# Altium PCB Smart_home.PcbDoc
Units mm, origin at the board's own origin, x right, y up, seen from the top; angles counter-clockwise.
Board outline 86.39 x 76.44 mm, 2 copper layers (Top Layer, Bottom Layer); 15 components, 39 nets, 127 pads, 6 vias.
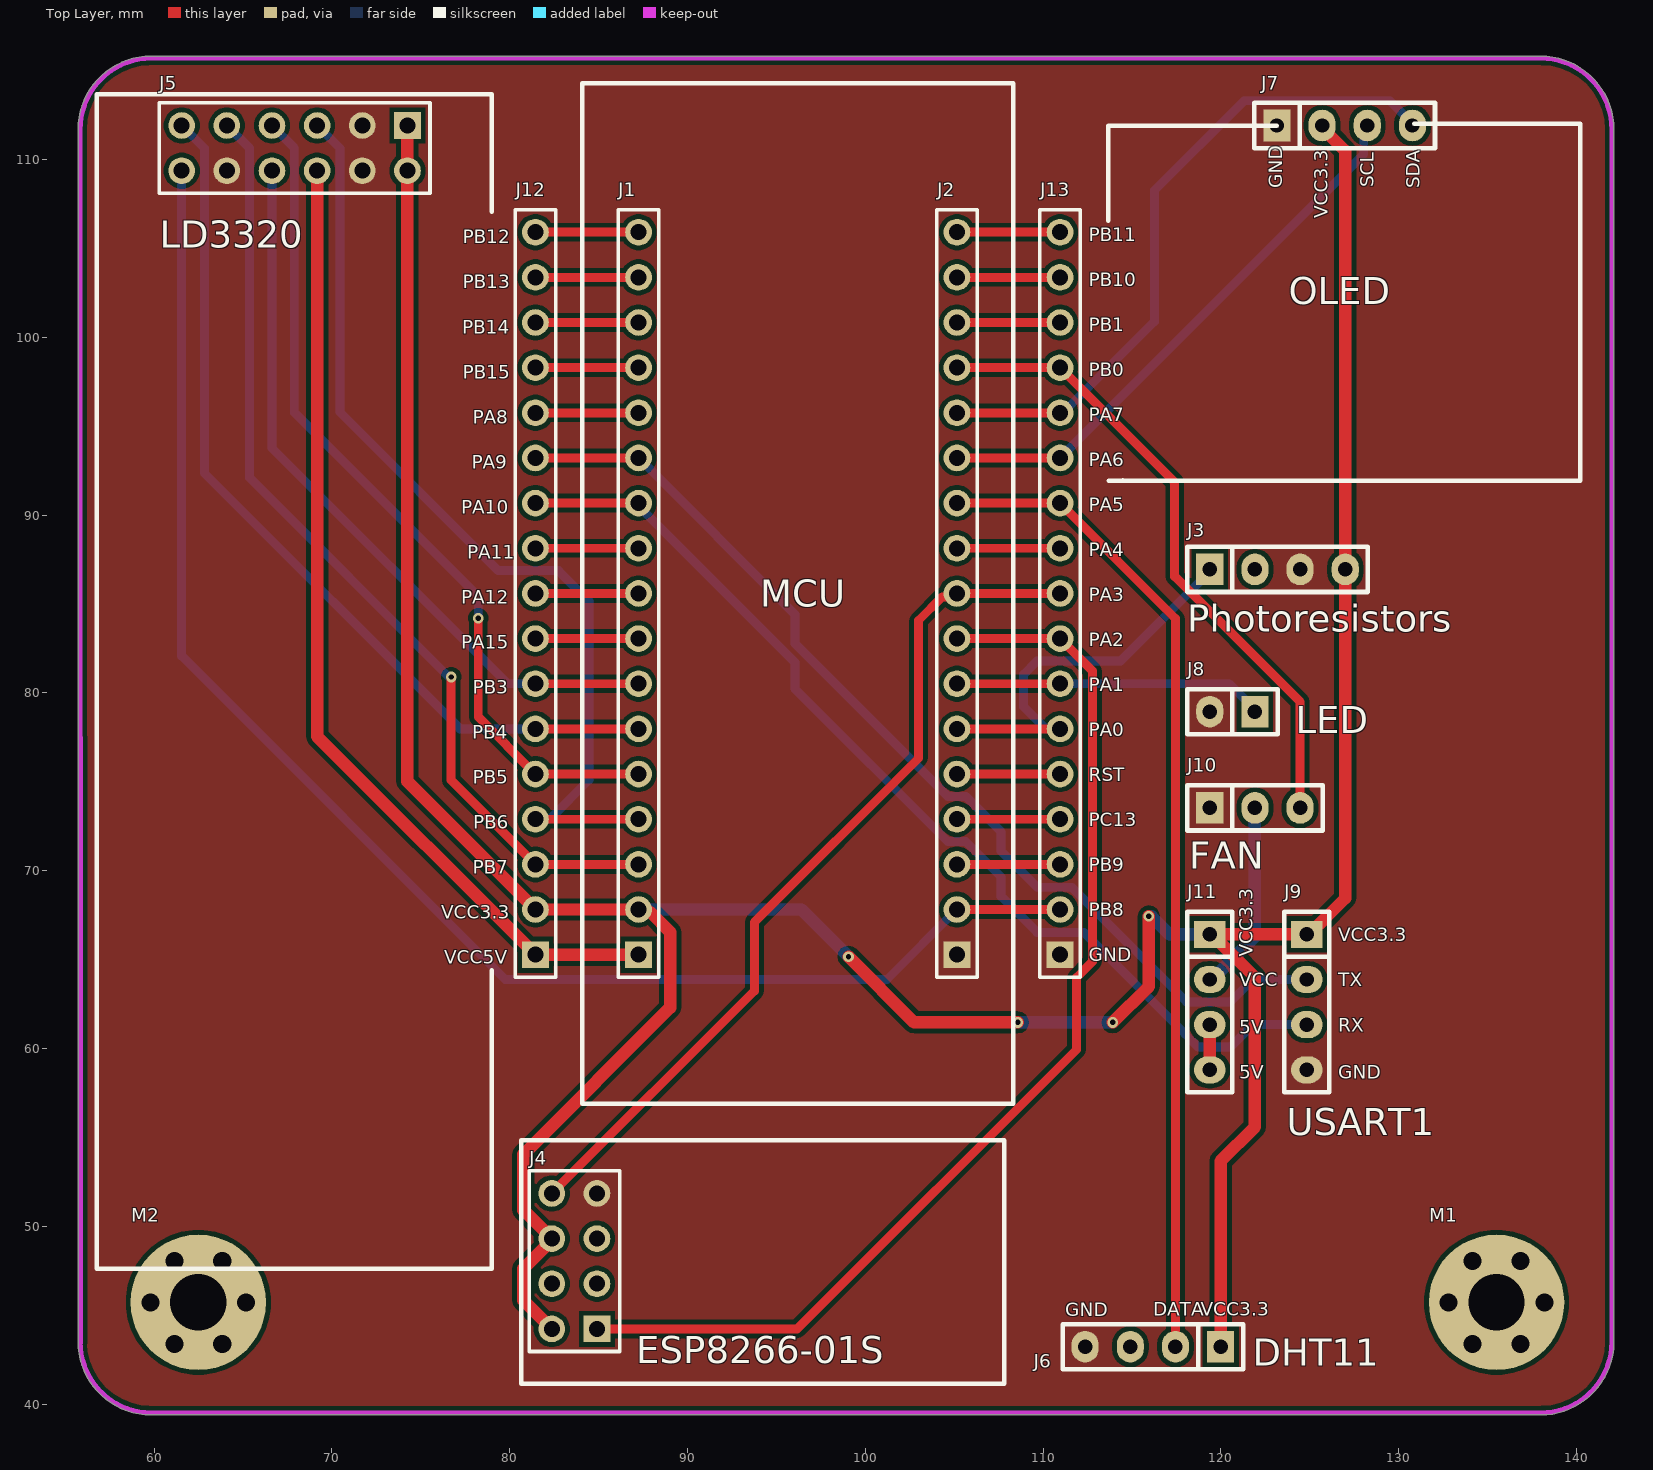
[diagram p0: Top Layer view]
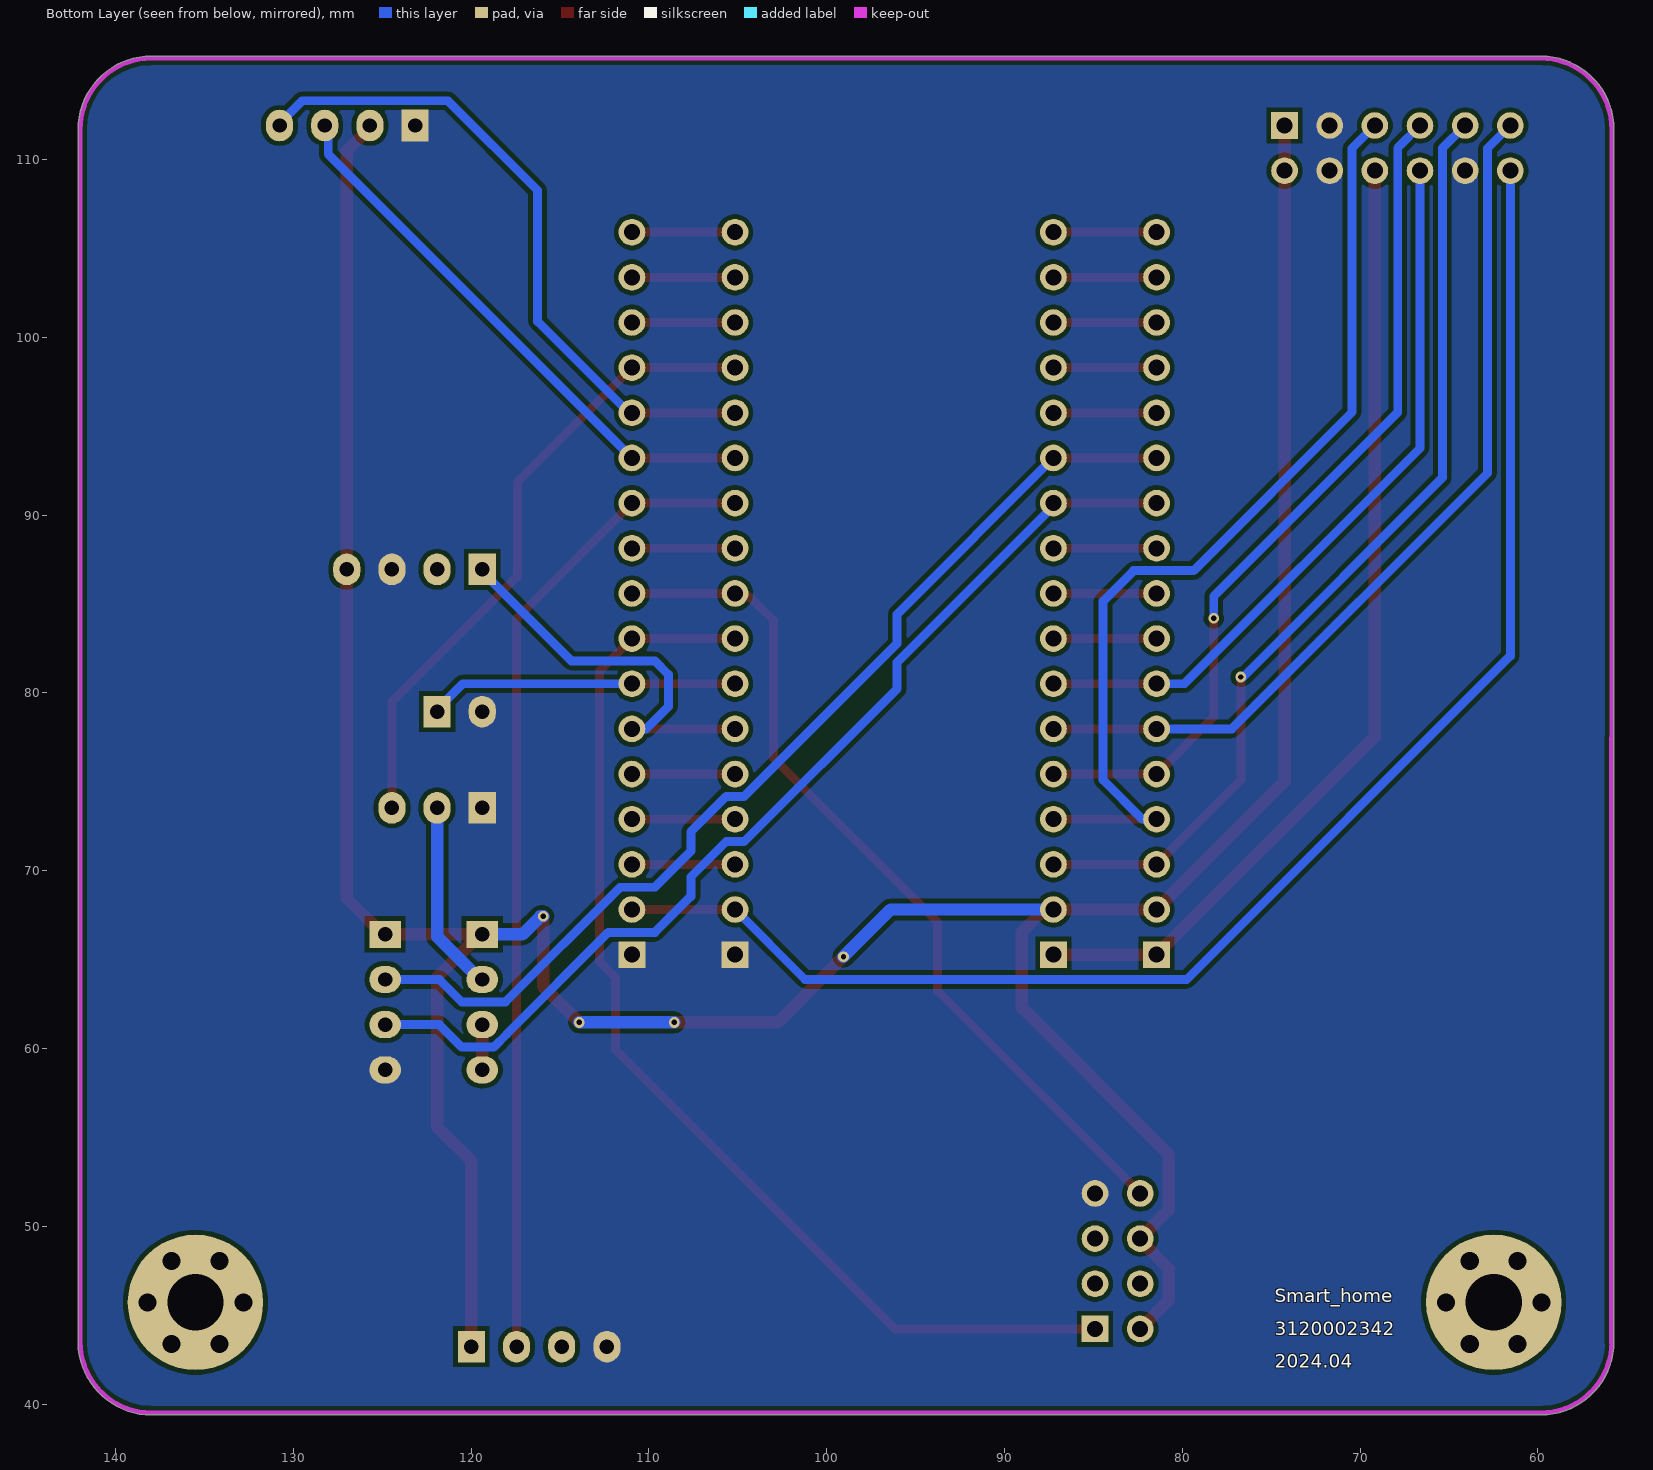
[diagram p1: Bottom Layer view, seen from below]
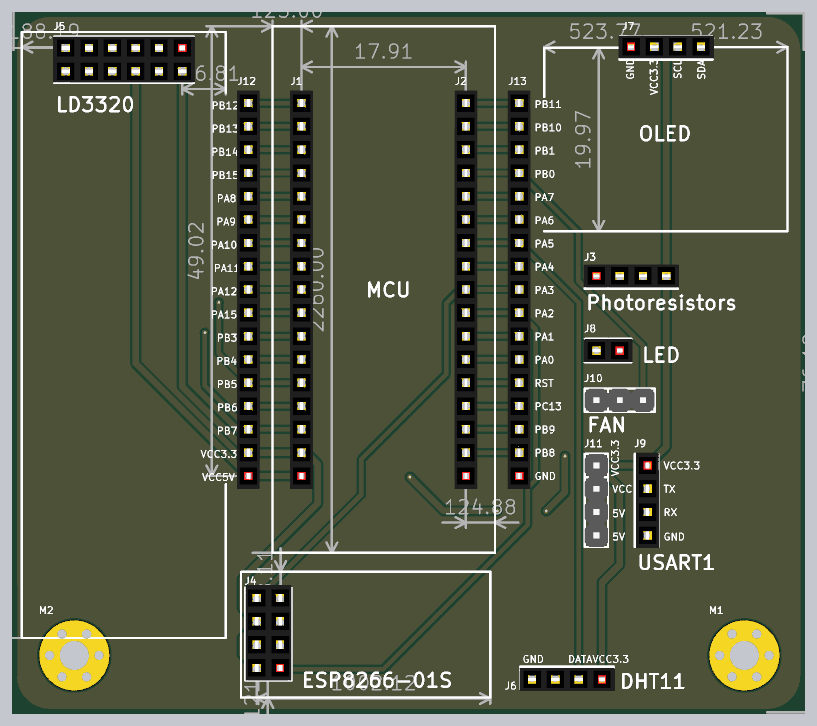
[diagram p2: 3D render of the assembled board from above, using the file's embedded part models]

## Layer stack, top to bottom
Top Solder: solder mask 0.0102, Solder Resist, Dk 3.5
Top Layer: signal copper 0.0356
Dielectric 1: dielectric 0.32, FR-4, Dk 4.8
Bottom Layer: signal copper 0.0356
Bottom Solder: solder mask 0.0102, Solder Resist, Dk 3.5

## Board outline
55.722,43.513 55.722,111.697 cw(c59.849,111.697) 59.81,115.824 59.817,115.824 137.986,115.824 cw(c137.986,111.697) 142.113,111.697 142.113,43.434 142.112,43.417 cw(c137.986,43.513) 137.986,39.386 59.817,39.386 59.81,39.386 cw(c59.849,43.513)

## Design rules (kind name [scope] priority, off if disabled: settings)
Clearance [All] p1: gap=0.254 ignorepadtopadclearanceinfootprint=FALSE except(0: Arc-Hole Track-Hole SMDPad-Hole THPad-Hole Via-Hole Fill-Hole Poly-Hole Region-Hole Text-Hole)
PlaneConnect [All] p1: planeconnectstyle=Direct reliefexpansion=0.508 reliefentries=4 reliefconductorwidth=0.254 reliefairgap=0.254
PolygonConnect [All] p1: connectstyle=Direct reliefconductorwidth=0.254 reliefentries=4 polygonreliefangle="90 Angle" airgapwidth=0.254
RoutingVias [All] p1: holewidth=0.302 width=0.602 viastyle="Through Hole" minholewidth=0.302 minwidth=0.602 maxholewidth=0.302 maxwidth=0.602
SilkToSilkClearance [All] p1: silktosilkclearance=0.05
SilkToSolderMaskClearance [IsPad] p1: minsilkscreentomaskgap=0.05 clearancetoexposedcopper=TRUE
SolderMaskExpansion [All] p1: expansion=0.102 istentingtop=FALSE
Width Width_1 [InNetClass('Power')] p1: maxlimit=0.7 minlimit=0.7 preferedwidth=0.7
Width [All] p2: maxlimit=0.5 minlimit=0.5 preferedwidth=0.5
27 further rules are at their usual default settings.

## Classes and differential pairs
net class Power: 5V GND VCC VCC3.3 VCC5V
component class Smart_home: J4 J5 J6 J9

## Components (designator, comment, footprint, x,y, rotation, side; value= is the part's Value field where it differs from the comment)
J1 "STM32_L" Fe-HDR1X17/2.54-S 87.249,65.278 r180 top
J2 "STM32_R" Fe-HDR1X17/2.54-S 105.159,65.278 r180 top
J3 "光敏电阻" Fe-HDR1X4/2.54-S 119.38,86.948 r90 top
J4 "ESP8266-01S" Fe-HDR2X4/2.54-S 84.909,44.228 r90 top
J5 "LD3320" Fe-HDR2X6/2.54-S 74.249,111.918 r180 top
J6 "DHT11" Fe-HDR1X4/2.54-S 119.989,43.228 r270 top
J7 "OLED" Fe-HDR1X4/2.54-S 123.159,111.918 r90 top
J8 "LED" Fe-HDR1X2/2.54-S 121.92,78.948 r180 top
J9 "USART1" Fe-HDR1X4/2.54-S 124.841,66.421 r0 top
J10 "风扇" "Pin HDR1X3/2.54mm-S" 119.38,73.533 r90 top
J11 "VCC3.3_VCC_5V" "Pin HDR1X4/2.54mm-S" 119.38,66.421 r0 top
J12 "STM32_L" Fe-HDR1X17/2.54-S 81.449,65.278 r180 top
J13 "STM32_R" Fe-HDR1X17/2.54-S 110.959,65.278 r180 top
M1 "M3" "M3 125X300" 135.509,45.72 r0 top
M2 "M3" "M3 125X300" 62.484,45.72 r0 top

## Footprints (in the part's own frame and the unit in brackets; to place one, negate y for a bottom-side part, rotate by r counter-clockwise, add the part's x,y. Pads: shape width x height; smd on the part's side, far side on the other; paste and mask are expansions set on the pad)
Fe-HDR1X2/2.54-S [mil] "Connector; Header; 2x2 Position"
  rect 60x70 hole 32: 1(0,0)
  oval 60x70 hole 32: 2(100,0)
  silkscreen extent -50,-50 150,50, body extent -55,-48 155,50, height 335
Fe-HDR1X4/2.54-S [mil]
  rect 70x60 hole 32: 1(0,0)
  oval 70x60 hole 32: 2(0,-100) 3(0,-200) 4(0,-300)
  silkscreen extent -50,-350 50,50, body extent -44,-355 54,55, height 335
Fe-HDR1X17/2.54-S [mm]
  rect 1.5x1.5 hole 0.9: 1(0,0)
  round 1.5 hole 0.9: 2(0,-2.54) 3(0,-5.08) 4(0,-7.62) 5(0,-10.16) 6(0,-12.7) 7(0,-15.24) 8(0,-17.78) 9(0,-20.32) 10(0,-22.86) 11(0,-25.4) 12(0,-27.94) 13(0,-30.48) 14(0,-33.02) 15(0,-35.56) 16(0,-38.1) 17(0,-40.64)
  silkscreen extent -1.14,-41.91 1.14,1.27, body extent -1.25,-42.04 1.25,1.4, height 3.2
Fe-HDR2X4/2.54-S [mm] "Connector; Header; 4x2 Position"
  rect 1.5x1.5 hole 0.9: 1(0,0)
  round 1.5 hole 0.9: 2(0,2.54) 3(2.54,0) 4(2.54,2.54) 5(5.08,0) 6(5.08,2.54) 7(7.62,0) 8(7.62,2.54)
  silkscreen extent -1.27,-1.27 8.89,3.81, body extent -1.27,-1.23 9.14,3.77, height 8.5
Fe-HDR2X6/2.54-S [mm] "Connector; Header; 6x2 Position"
  rect 1.5x1.5 hole 0.9: 1(0,0)
  round 1.5 hole 0.9: 2(0,2.54) 3(2.54,0) 4(2.54,2.54) 5(5.08,0) 6(5.08,2.54) 7(7.62,0) 8(7.62,2.54) 9(10.16,0) 10(10.16,2.54) 11(12.7,0) 12(12.7,2.54)
  silkscreen extent -1.27,-1.27 13.97,3.81, body extent -1.39,-1.23 14.1,3.77, height 8.5
"M3 125X300" [mil] "M3螺丝孔，孔125Mil，焊盘300Mil"
  round 40 hole 40: 1(-106,0) 1(-53,-91.8) 1(-53,91.8) 1(53,-91.8) 1(53,91.8) 1(106,0)
  round 300 hole 125: 1(0,0)
"Pin HDR1X3/2.54mm-S" [mil]
  rect 70x60 hole 32: 1(0,0)
  oval 70x60 hole 32: 2(0,-100) 3(0,-200)
  silkscreen extent -50,-250 50,50, body extent -50,-250 50,50, height 336
"Pin HDR1X4/2.54mm-S" [mil]
  rect 70x60 hole 32: 1(0,0)
  oval 70x60 hole 32: 2(0,-100) 3(0,-200) 4(0,-300)
  silkscreen extent -50,-350 50,50, body extent -50,-350 50,50, height 336

## Part data
J1 J2 J12 J13: library part "Female HDR1X17"
J3 J6 J7 J9: library part "Female HDR1X4"
J4: library part "Female HDR2X4"
J5: library part "Female HDR2X6"
J8: library part "Female HDR1X2"
J10: library part "Pin HDR1X3"
J11: library part "Pin HDR1X4"
M1 M2: "铜柱孔", BOM名称=铜柱孔, 学习资源=www.ooocke.com, 版权归属=源创客

## Via types
v1: diameter 0.602, hole 0.302, Top Layer to Bottom Layer, tented both sides, 6 vias

## Nets (pads, with @x,y where several pads share a name; then routed paths per layer and width w, separated by ;. In a path a pad name is that pad's centre, name@x,y a point inside that pad or via, vN(x,y) a via of type N, cw(c..) or ccw(c..) an arc to the next point about the centre after c; other vN are vias at no path point)
5V: J11.3 J11.4 | length 2.5
  Top Layer w0.7: J11.4 J11.3
DO: J3.2
GND: J2.1 J3.3 J4.7 J5.3 J5.4 J5.10 J6.4 J7.1 J8.2 J9.4 J10.1 J13.1
IO0: J4.3
IO2: J4.5
PA0_AO: J2.6 J3.1 J13.6 | length 22.4
  Top Layer w0.5: J2.6 J13.6
  Bottom Layer w0.5: 110.159,77.978 108.905,79.232 108.905,81.037 109.672,81.804 114.363,81.804 119.38,86.821 J3.1
PA1: J2.7 J8.1 J13.7 | length 17.5
  Top Layer w0.5: J2.7 J13.7
  Bottom Layer w0.5: J13.7 120.477,80.518 121.92,79.075 J8.1
PA2_RX: J2.8 J4.1 J13.8 | length 63.5
  Top Layer w0.5: J4.1 96.171,44.228 111.887,59.944 111.887,63.993 112.776,64.882 112.776,81.241 J13.8 J2.8
PA3_TX: J2.9 J4.8 J13.9 | length 49.4
  Top Layer w0.5: J4.8 93.742,63.221 93.764,63.221 93.764,67.094 102.997,76.327 102.997,84.074 104.33,85.407 104.968,85.407 J2.9 J13.9
PA4: J2.10 J13.10 | length 5.8
  Top Layer w0.5: J2.10 J13.10
PA5_DATA: J2.11 J6.2 J13.11 | length 55.9
  Top Layer w0.5: J2.11 J13.11 117.449,84.188 J6.2
PA6_SCL: J2.12 J7.3 J13.12 | length 31.7
  Top Layer w0.5: J2.12 J13.12
  Bottom Layer w0.5: J13.12 128.043,110.302 128.043,111.722 J7.3
PA7_SDA: J2.13 J7.4 J13.13 | length 38
  Top Layer w0.5: J2.13 J13.13
  Bottom Layer w0.5: J13.13 J13.13@111.125,95.758 ; J13.13@111.23,95.758 J13.13@111.125,95.758 ; J7.4 130.779,112.045 129.513,113.311 121.312,113.311 116.269,108.268 116.269,100.902 J13.13@111.125,95.758
PA8: J1.13 J12.13 | length 5.8
  Top Layer w0.5: J12.13 J1.13
PA9_USART1_TX: J1.12 J9.2 J12.12 | length 58.2
  Top Layer w0.5: J12.12 J1.12
  Bottom Layer w0.5: J1.12 96.04,84.427 96.04,82.784 104.64,74.184 105.646,74.184 107.643,72.187 107.643,71.101 109.672,69.072 111.623,69.072 118.08,62.615 120.527,62.615 121.793,63.881 J9.2
PA10_USART1_RX: J1.11 J9.3 J12.11 | length 57.4
  Top Layer w0.5: 82.249,90.678 J1.11
  Bottom Layer w0.5: J1.11 87.249,90.508 96.04,81.717 96.04,80.244 104.64,71.644 105.646,71.644 107.643,69.647 107.643,68.561 109.672,66.532 112.284,66.532 117.987,60.829 117.987,60.817 118.729,60.075 120.527,60.075 121.793,61.341 J9.3
PA11: J1.10 J12.10 | length 5.8
  Top Layer w0.5: J12.10 J1.10
PA12: J1.9 J12.9 | length 5.8
  Top Layer w0.5: J12.9 J1.9
PA15: J1.8 J12.8 | length 5.8
  Top Layer w0.5: J12.8 J1.8
PB0_S: J2.14 J10.3 J13.14 | length 36.2
  Top Layer w0.5: J2.14 J13.14 117.405,91.852 117.405,86.559 124.46,79.504 J10.3
PB1: J2.15 J13.15 | length 5.8
  Top Layer w0.5: J2.15 J13.15
PB3_RST: J1.7 J5.8 J12.7 | length 41.7
  Top Layer w0.5: J12.7 J1.7
  Bottom Layer w0.5: J5.8 66.629,93.772 79.883,80.518 J12.7
PB4_CS: J1.6 J5.11 J12.6 | length 50.5
  Top Layer w0.5: J12.6 J1.6
  Bottom Layer w0.5: J5.11 62.835,110.632 62.835,92.359 77.216,77.978 J12.6
PB5_MO: J1.5 J5.7 J12.5 | length 48.4
  Top Layer w0.5: v1(78.232,84.201) 78.232,78.655 J12.5 J1.5
  Bottom Layer w0.5: J5.7 67.883,110.664 67.883,95.778 78.232,85.429 v1(78.232,84.201)
PB6_MI: J1.4 J5.5 J12.4 | length 54
  Top Layer w0.5: J12.4 J1.4
  Bottom Layer w0.5: J5.5 70.455,110.632 70.455,95.788 79.359,86.884 82.736,86.884 84.455,85.165 84.455,75.104 82.249,72.898
PB7_SCK: J1.3 J5.9 J12.3 | length 54.6
  Top Layer w0.5: v1(76.708,80.899) 76.708,75.099 J12.3 J1.3
  Bottom Layer w0.5: J5.9 65.375,110.632 65.375,92.105 76.581,80.899 v1(76.708,80.899)
PB8_IRQ: J2.2 J5.12 J13.2 | length 85.9
  Top Layer w0.5: J2.2 J13.2
  Bottom Layer w0.5: J5.12 61.549,82.088 79.756,63.881 101.222,63.881 J2.2
PB9: J2.3 J13.3 | length 5.8
  Top Layer w0.5: J2.3 J13.3
PB10: J2.16 J13.16 | length 5.8
  Top Layer w0.5: J2.16 J13.16
PB11: J2.17 J13.17 | length 5.8
  Top Layer w0.5: J2.17 J13.17
PB12: J1.17 J12.17 | length 5.8
  Top Layer w0.5: J12.17 J1.17
PB13: J1.16 J12.16 | length 5.8
  Top Layer w0.5: J12.16 J1.16
PB14: J1.15 J12.15 | length 5.8
  Top Layer w0.5: J12.15 J1.15
PB15: J1.14 J12.14 | length 5.8
  Top Layer w0.5: J12.14 J1.14
PC13: J2.4 J13.4 | length 5.8
  Top Layer w0.5: J2.4 J13.4
RST: J2.5 J13.5 | length 5.8
  Top Layer w0.5: J2.5 J13.5
VCC: J10.2 J11.2 | length 10.8
  Bottom Layer w0.7: J11.2 119.507,63.881 121.92,66.294 J10.2
VCC3.3: J1.2 J3.4 J4.2 J4.6 J5.1 J5.2 J6.1 J7.2 J9.1 J11.1 J12.2 | length 200.3
  Top Layer w0.7: J5.1 J5.2 74.249,75.018 J12.2 J1.2 87.402,67.665 87.91,67.665 89.027,66.548 89.027,62.296 80.772,54.041 80.772,50.905 J4.6 ; J4.2 80.772,45.825 80.772,47.625 J4.6@82.412,49.265 ; v1(99.06,65.163) 102.755,61.468 v1(108.585,61.468) ; v1(113.919,61.468) 115.951,63.5 v1(115.951,67.437) ; J11.1 J11.1@119.507,66.421 ; J6.1 119.989,53.665 121.92,55.596 121.92,64.008 J11.1@119.507,66.421 ; J7.2 125.699,111.791 127,110.49 J3.4 127,68.453 124.968,66.421 J9.1 J11.1@119.507,66.421
  Bottom Layer w0.7: J1.2 96.405,67.818 v1(99.06,65.163) ; v1(108.585,61.468) v1(113.919,61.468) ; v1(115.951,67.437) 116.105,67.437 117.121,66.421 J11.1
VCC5V: J1.1 J5.6 J12.1 | length 55
  Top Layer w0.7: J5.6 69.169,77.558 J12.1 J1.1
pads on no net: J4.4 J6.3 M1.1 M2.1

## Polygon pours and split planes (outlines as drawn)
GND on Top Layer "GND_L01_P000" (solid, remove dead copper, pour order 0): 25.4,25.4 177.8,25.4 177.8,127 25.4,127
GND on Bottom Layer "GND_L02_P001" (solid, remove dead copper, pour order 1): 25.4,25.4 177.8,25.4 177.8,127 25.4,127

## Keep-outs
Keep-Out Layer:
  lines w0.254: 55.849,43.513 ccw(c59.849,43.513) 59.849,39.513 ; 55.88,43.434 55.849,111.697 cw(c59.849,111.697) 59.849,115.697 ; 59.817,39.513 137.986,39.513 ccw(c137.986,43.513) 141.986,43.513 ; 59.817,115.697 137.986,115.697 cw(c137.986,111.697) 141.986,111.697 141.986,43.434

## Silkscreen, mask and mechanical layers (free items; w line width, h text height)
Top Overlay:
  lines w0.254: 78.994,64.389 78.994,47.625 56.769,47.625 56.769,113.665 78.994,113.665 78.994,107.061 ; 113.665,111.887 113.696,111.918 123.159,111.918 ; 113.681,106.569 113.681,111.903 ; 113.696,91.948 140.208,91.948 140.208,112.03 130.891,112.03 ; 114.481,91.964 114.496,91.948 ; 80.645,41.132 107.823,41.132 107.823,54.848 80.645,54.848 80.645,41.132 ; 84.074,56.896 108.331,56.896 108.331,114.3 84.074,114.3 84.074,56.896
  text "SCL" at 128.609,108.458 h0.76 r90
  text "GND" at 123.444,108.385 h0.76 r90
  text "SDA" at 131.191,108.393 h0.76 r90
  text "VCC3.3" at 126.026,106.709 h0.76 r90
  text "PB11" at 112.56,105.41 h0.76
  text "PB12" at 77.359,105.283 h0.76
  text "LD3320" at 60.325,105.029 h1.52
  text "PB10" at 112.56,102.878 h0.76
  text "PB13" at 77.359,102.751 h0.76
  text "OLED" at 123.825,101.854 h1.52
  text "PB1" at 112.56,100.346 h0.76
  text "PB14" at 77.323,100.219 h0.76
  text "PB0" at 112.56,97.814 h0.76
  text "PB15" at 77.359,97.687 h0.76
  text "PA7" at 112.56,95.282 h0.76
  text "PA8" at 77.918,95.155 h0.76
  text "PA6" at 112.56,92.75 h0.76
  text "PA9" at 77.874,92.623 h0.76
  text "PA5" at 112.56,90.218 h0.76
  text "PA10" at 77.279,90.091 h0.76
  text "PA4" at 112.56,87.686 h0.76
  text "PA11" at 77.606,87.559 h0.76
  text "PA3" at 112.56,85.153 h0.76
  text "PA12" at 77.279,85.026 h0.76
  text "MCU" at 94.107,84.836 h1.52
  text "Photoresistors" at 118.11,83.439 h1.52
  text "PA2" at 112.56,82.621 h0.76
  text "PA15" at 77.279,82.494 h0.76
  text "PA1" at 112.56,80.089 h0.76
  text "PB3" at 77.918,79.962 h0.76
  text "LED" at 124.206,77.724 h1.52
  text "PA0" at 112.56,77.557 h0.76
  text "PB4" at 77.882,77.43 h0.76
  text "RST" at 112.56,75.025 h0.76
  text "PB5" at 77.918,74.898 h0.76
  text "PC13" at 112.56,72.493 h0.76
  text "PB6" at 77.954,72.366 h0.76
  text "FAN" at 118.237,70.104 h1.52
  text "PB9" at 112.56,69.961 h0.76
  text "PB7" at 77.918,69.834 h0.76
  text "PB8" at 112.56,67.429 h0.76
  text "VCC3.3" at 76.162,67.302 h0.76
  text "VCC3.3" at 126.619,66.032 h0.76
  text "VCC3.3" at 121.793,65.151 h0.76 r90
  text "GND" at 112.56,64.897 h0.76
  text "VCC5V" at 76.329,64.77 h0.76
  text "VCC" at 121.031,63.492 h0.76
  text "TX" at 126.619,63.492 h0.76
  text "RX" at 126.619,60.952 h0.76
  text "5V" at 121.031,60.825 h0.76
  text "5V" at 121.031,58.285 h0.76
  text "GND" at 126.619,58.285 h0.76
  text "USART1" at 123.698,55.118 h1.52
  text "GND" at 111.252,44.95 h0.76
  text "DATA" at 116.205,44.958 h0.76
  text "VCC3.3" at 118.872,44.958 h0.76
  text "ESP8266-01S" at 87.122,42.291 h1.52
  text "DHT11" at 121.793,42.164 h1.52
Bottom Overlay:
  text "Smart_home" at 74.803,45.72 h0.76
  text "3120002342" at 74.803,43.878 h0.76
  text "2024.04" at 74.803,42.037 h0.76

## Dimensions
87.249,105.918 to 105.159,105.918 on Top Paste
82.369,44.228 to 107.823,39.878 on Top Paste
82.369,44.228 to 80.645,41.132 on Top Paste
82.369,51.848 to 80.645,54.848 on Top Paste
74.249,111.918 to 78.994,111.887 on Top Paste
61.549,111.918 to 56.769,110.871 on Top Paste
105.159,65.278 to 108.331,65.151 on Top Paste
87.249,105.918 to 84.074,105.664 on Top Paste
126.969,112.045 to 113.665,113.538 on Top Paste
137.986,115.697 to 137.986,39.513 on Top Paste
55.849,111.697 to 141.986,111.697 on Top Paste
126.969,112.045 to 140.208,112.014 on Top Paste
61.549,111.918 to 61.849,47.625 on Top Paste
123.159,111.918 to 122.301,91.948 on Top Paste
81.915,114.3 to 93.853,56.896 on Top Paste
81.449,65.278 to 81.915,114.3 on Top Paste